# Altium PCB GEX_Zero.PcbDoc
Units mil, origin at the board's own origin, x right, y up, seen from the top; angles counter-clockwise.
Board outline 2559.06 x 1181.1 mil, 2 copper layers (Top Layer, Bottom Layer); 35 components, 63 nets, 209 pads, 187 vias.
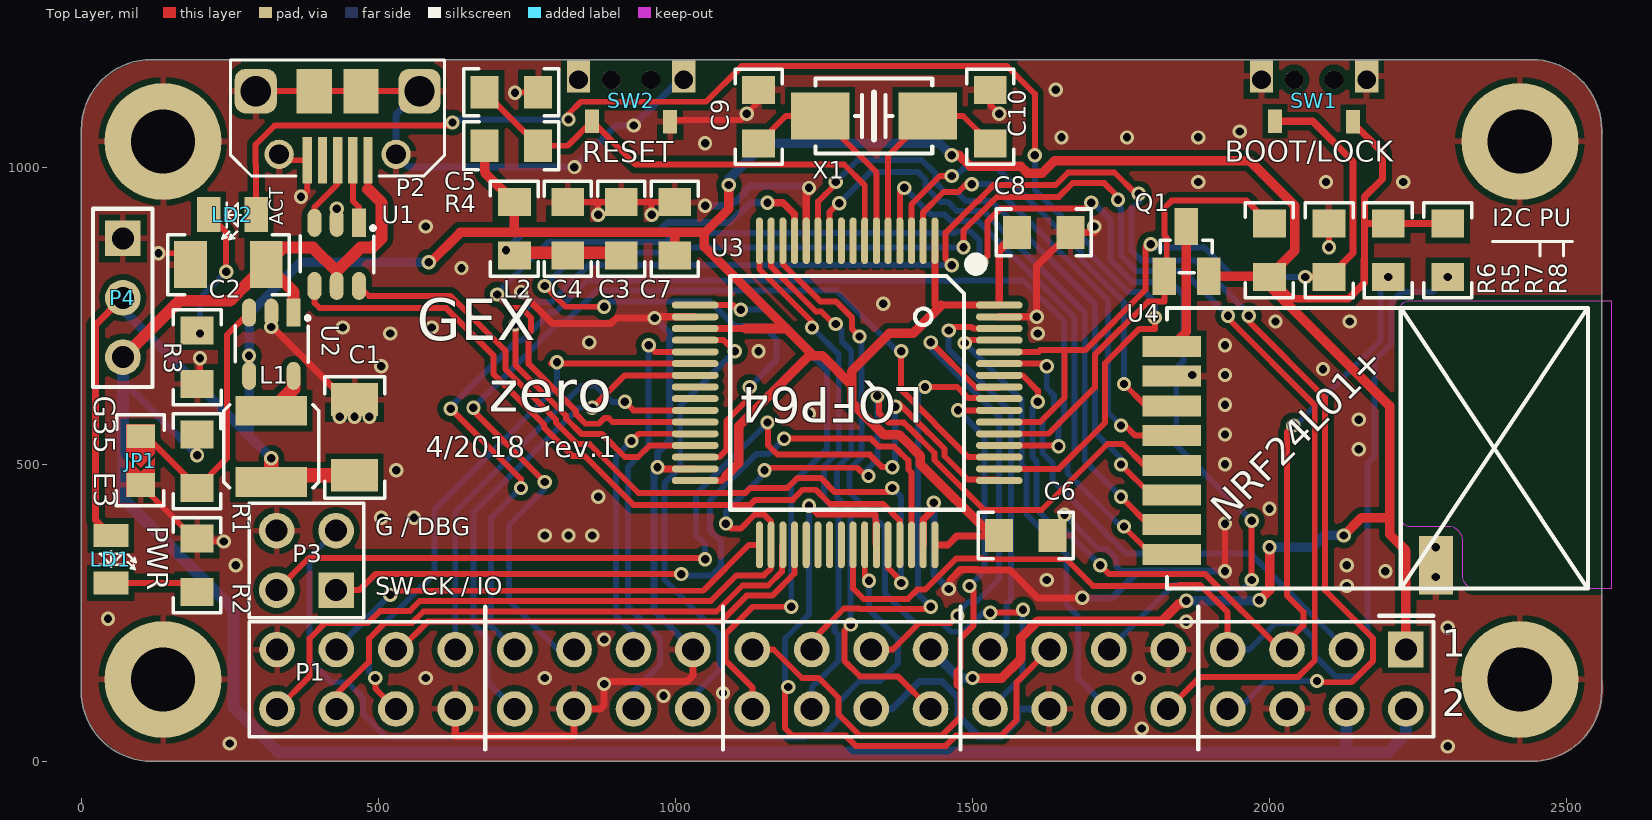
[diagram p0: Top Layer view]
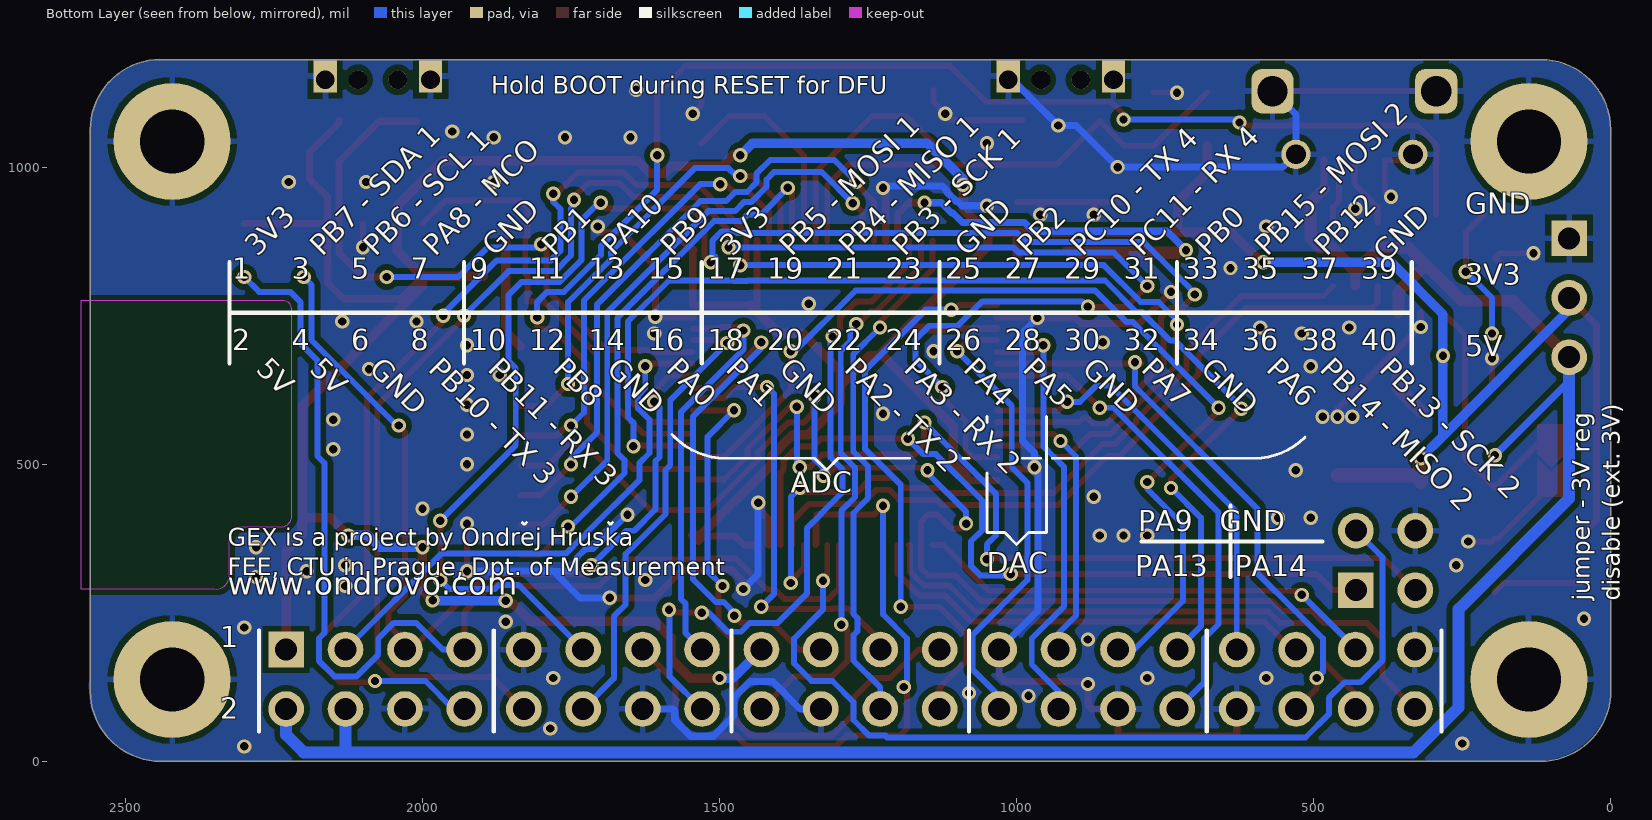
[diagram p1: Bottom Layer view, seen from below]

## Layer stack, top to bottom
Top Solder: solder mask 0.4, Solder Resist, Dk 3.5
Top Layer: signal copper 1.4
Dielectric 1: dielectric 12.6, FR-4, Dk 4.8
Bottom Layer: signal copper 1.4
Bottom Solder: solder mask 0.4, Solder Resist, Dk 3.5

## Board outline
118.11,0 cw(c118.11,118.11) 0,118.11 0,1062.99 cw(c118.11,1062.99) 118.11,1181.1 2440.95,1181.1 cw(c2440.95,1062.99) 2559.06,1062.99 2559.05,118.11 cw(c2440.95,118.11) 2440.94,0

## Design rules (kind name [scope] priority, off if disabled: settings)
Clearance Clearance_1 [OnLayer('Bottom Overlay') vs OnLayer('Bottom Overlay')] p1: gap=3
Clearance [All] p2: gap=10 except(7: Track-Track Track-SMDPad SMDPad-SMDPad)
DiffPairsRouting [All] p1: maxlimit=10 minlimit=10 mostfreqgap=10 toplayer_minwidth=7 toplayer_maxwidth=16 toplayer_prefwidth=10 bottomlayer_minwidth=7 bottomlayer_maxwidth=16 bottomlayer_prefwidth=10 maxuncoupledlength=500
MinimumSolderMaskSliver [All] p1 off: minsoldermaskwidth=10
PolygonConnect PolygonConnect_GND [All vs InNet('GND') And IsVia] p1: connectstyle=Direct reliefconductorwidth=10 reliefentries=4 polygonreliefangle="90 Angle" airgapwidth=10
PolygonConnect [All] p2: connectstyle=Relief reliefconductorwidth=10 reliefentries=4 polygonreliefangle="90 Angle" airgapwidth=10
RoutingVias [All] p1: holewidth=14 width=24 viastyle="Through Hole" minholewidth=14 minwidth=24 maxholewidth=100 maxwidth=100
SilkToSilkClearance [All] p1 off: silktosilkclearance=10
SilkToSolderMaskClearance [IsPad] p1 off: minsilkscreentomaskgap=10 clearancetoexposedcopper=TRUE
SolderMaskExpansion [All] p1: expansion=2
Width ThickSupply [(InNet('3V3') OR InNet('3V3A') OR InNet('5V'))] p1: maxlimit=40 minlimit=12 preferedwidth=40
Width [All] p2: maxlimit=100 minlimit=7 preferedwidth=10
26 further rules are at their usual default settings.

## Classes and differential pairs
component class GEX_Zero: C1 C2 C3 C4 C5 C6 C7 C8 C9 C10 JP1 L1 L2 LD1 LD2 P1 P2 P3 P4 Q1 R1 R2 R3 R4 R5 R6 SW1 SW2 U1 U3 U4 X1
differential pair USB: +USB_P -USB_N

## Components (designator, comment, footprint, x,y, rotation, side; value= is the part's Value field where it differs from the comment)
C1 "4u7" C1206 460,545 r270 top
C2 "4u7" C1206 247.75,836 r0 top
C3 "1u" C0805 909,896 r270 top
C4 "100n" C0805 819,896 r270 top
C5 "100n" C0805 724,1126 r180 top
C6 "100n" C0805 1590,380 r180 top
C7 "100n" C0805 999,896 r270 top
C8 "1u" C0805 1620,890 r180 top
C9 "12p" C0805 1140,1085 r270 top
C10 "12p" C0805 1530,1085 r270 top
JP1 "EXT_SUP" 0805_SolderShort_2 100,502.88 r270 top
L1 "4.7uH" L_3x3 320,530 r270 top
L2 "BEAD" R0805 729,896 r270 top
LD1 "PWR" LED_SMD 50,340 r270 top
LD2 "ACT" LED_SMD 254.32,920 r180 top
P1 "RPi 20x2 Header" PIN_2x20 2229.47,188 r180 top locked
P2 "USB_Micro_TypeB_Molex_105017" USB_Micro-B_AFCI_10118194 431.54,1184.94 r180 top locked
P3 "Rpi 2x2 Header" PIN_2x2 379,338 r180 top locked
P4 "EPW" PIN_1x3 70,780 r270 top
Q1 "BSS84" SOT23 1823,816 r0 top
R1 "100k" R0805 195,505 r270 top
R2 "470" R0805 195,330 r270 top
R3 "1k" R0805 195,680 r90 top
R4 "100k" R0805 724,1036 r0 top
R5 "100k" R0805 2100,860 r90 top
R6 "100k" R0805 2000,860 r270 top
R7 "1k8" R0805 2200,860 r270 top
R8 "1k8" R0805 2300,860 r270 top
SW1 "BOOT/LOCK" SIDE_BTN_2-4-3.5 2075,1147 r0 top
SW2 "RESET" SIDE_BTN_2-4-3.5 925.46,1147 r0 top
U1 "ESD" SOT23-6 467.4,898.43 r270 top
U2 "MCP1603" SOT23-5 357.4,747.13 r270 top
U3 "STM32F072RBT6" LQFP64 1436.8,846.47 r270 top locked
U4 "NRF_MINI" NRF_MINI 1827.24,763.07 r270 top locked
X1 "8MHz" XTAL-SMD-50-32 1334,1086 r0 top

## Footprints (in the part's own frame and the unit in brackets; to place one, negate y for a bottom-side part, rotate by r counter-clockwise, add the part's x,y. Pads: shape width x height; smd on the part's side, far side on the other; paste and mask are expansions set on the pad)
0805_SolderShort_2 [mil] "To make solder short, 0805 compatible."
  rect 40x48 smd: 1(-44,0) 2(37.88,0)
  Top Layer region: -8.12,24 40.88,24 57.88,24 57.88,-24 -8.12,-24 15.88,0
  Top Layer region: -64,24 -15,24 9,0 -15,-24 -64,-24
  silkscreen extent -80,-41 73,40, body extent -45,-7 39,8, height 5
C0805 [mm]
  rect 1.2x1.4 smd: 1(-1.143,0) 2(1.143,0)
  silkscreen extent -2.03,-1 2.03,1, body extent -1,-0.63 1,0.63, height 0.5
C1206 [mm]
  rect 1.4x2 smd: 1(-1.619,0) 2(1.619,0)
  silkscreen extent -2.6,-1.28 2.6,1.28, body extent -1.6,-0.8 1.6,0.8, height 1
L_3x3 [mil]
  rect 50x120 smd: 1(-60,0) 2(60,0)
  silkscreen extent -70,-80 70,80, body extent -60,-60 60,60, height 50
LED_SMD [mm]
  rect 1x1.5 smd: A(-1.016,0) C(1.016,0)
  silkscreen extent -0.36,-0.51 0.43,1.05, body extent -1.05,-0.45 1.02,0.45, height 0.85
LQFP64 [mm]
  oval 2x0.3 smd: 1(-0.75,0) 2(-0.75,-0.5) 3(-0.75,-1) 4(-0.75,-1.5) 5(-0.75,-2) 6(-0.75,-2.5) 7(-0.75,-3) 8(-0.75,-3.5) 9(-0.75,-4) 10(-0.75,-4.5) 11(-0.75,-5) 12(-0.75,-5.5) 13(-0.75,-6) 14(-0.75,-6.5) 15(-0.75,-7) 16(-0.75,-7.5) 33(12.25,-7.5) 34(12.25,-7) 35(12.25,-6.5) 36(12.25,-6) 37(12.25,-5.5) 38(12.25,-5) 39(12.25,-4.5) 40(12.25,-4) 41(12.25,-3.5) 42(12.25,-3) 43(12.25,-2.5) 44(12.25,-2) 45(12.25,-1.5) 46(12.25,-1) 47(12.25,-0.5) 48(12.25,0)
  oval 0.3x2 smd: 17(2,-10.25) 18(2.5,-10.25) 19(3,-10.25) 20(3.5,-10.25) 21(4,-10.25) 22(4.5,-10.25) 23(5,-10.25) 24(5.5,-10.25) 25(6,-10.25) 26(6.5,-10.25) 27(7,-10.25) 28(7.5,-10.25) 29(8,-10.25) 30(8.5,-10.25) 31(9,-10.25) 32(9.5,-10.25) 49(9.5,2.75) 50(9,2.75) 51(8.5,2.75) 52(8,2.75) 53(7.5,2.75) 54(7,2.75) 55(6.5,2.75) 56(6,2.75) 57(5.5,2.75) 58(5,2.75) 59(4.5,2.75) 60(4,2.75) 61(3.5,2.75) 62(3,2.75) 63(2.5,2.75) 64(2,2.75)
  silkscreen extent 0,-8.75 10.75,2, body extent 0.75,-8.75 10.75,1.25, height 1.6
NRF_MINI [mm]
  rect 0.9x2.5 smd: 1(1.65,0.2) 2(2.92,0.2) 3(4.19,0.2) 4(5.46,0.2) 5(6.73,0.2) 6(8,0.2) 7(9.27,0.2) 8(10.54,0.2)
  rect 2.5x1.45 smd: 9(11,11.5)
  silkscreen extent 0,0 12,18, body extent 0,0 12,18, height 1.5
PIN_1x3 [mil] "Header 1Row 3Way 2.54mm"
  rect 60x60 hole 37: 1(-100,0)
  round 60 hole 37: 2(0,0) 3(100,0)
  silkscreen extent -150,-50 150,50, body extent -150,-50 150,50, height 400
PIN_2x2 [mil] "Header 2Row 2Way 2.54mm"
  rect 60x60 hole 37: 1(-50,50)
  round 60 hole 37: 2(50,50) 3(-50,-50) 4(50,-50)
  silkscreen extent -97,-97 97,97, body extent -100,-100 100,100, height 400
PIN_2x20 [mil] "Header 2Row 16Way 2.54mm"
  rect 60x60 hole 37: 1(0,0)
  round 60 hole 37: 2(0,100) 3(100,0) 4(100,100) 5(200,0) 6(200,100) 7(300,0) 8(300,100) 9(400,0) 10(400,100) 11(500,0) 12(500,100) 13(600,0) 14(600,100) 15(700,0) 16(700,100) 17(800,0) 18(800,100) 19(900,0) 20(900,100) 21(1000,0) 22(1000,100) 23(1100,0) 24(1100,100) 25(1200,0) 26(1200,100) 27(1300,0) 28(1300,100) 29(1400,0) 30(1400,100) 31(1500,0) 32(1500,100) 33(1600,0) 34(1600,100) 35(1700,0) 36(1700,100) 37(1800,0) 38(1800,100) 39(1900,0) 40(1900,100)
  silkscreen extent -47,-57 1947,147, body extent -50,-50 1950,150, height 400
R0805 [mm]
  rect 1.2x1.4 smd: 1(-1.143,0) 2(1.143,0)
  silkscreen extent -2.03,-1.03 2.03,1.02, body extent -1,-0.63 1,0.63, height 0.5
SIDE_BTN_2-4-3.5 [mm] "Miniature side push 2-pad button with optional mechanical pins and through-hole bracket"
  rect 0.6x1 smd: 1(-1.67,-1.775) 2(1.67,-1.8)
  rect 1x1.4 hole 0.8 copper offset 0,0.15: 3(-2.25,0) 3(2.25,0)
  round 0.79 hole 0.8 unplated: 5(-0.85,0) 5(0.85,0)
  body extent -2.25,-1.5 2.25,2, height 1.8
SOT23 [mm]
  rect 1x1.6 smd: 1(0,0) 2(1.905,0) 3(0.94,2.134)
  silkscreen extent -0.18,0.15 2.06,1.55, body extent -0.48,-0.31 2.44,2.24, height 0.94
SOT23-5 [mm]
  rect 1.2x0.6 smd: 1(-0.2,0)
  oval 1.2x0.6 smd: 2(-0.2,-0.95) 3(-0.2,-1.9) 4(2.5,-1.9) 5(2.5,0)
  silkscreen extent -0.05,-2.5 1.93,0.67, body extent -0.24,-2.35 2.55,0.45, height 0.8
SOT23-6 [mm]
  rect 1.2x0.6 smd: 1(-0.2,0)
  oval 1.2x0.6 smd: 2(-0.2,-0.95) 3(-0.2,-1.9) 4(2.5,-1.9) 5(2.5,-0.95) 6(2.5,0)
  silkscreen extent -0.05,-2.5 1.93,0.68, body extent -0.24,-2.35 2.55,0.45, height 0.8
USB_Micro-B_AFCI_10118194 [mm]
  rect 0.4x2 smd: 1(-1.3,4.404) 2(-0.65,4.404) 3(0,4.404) 4(0.65,4.404) 5(1.3,4.404)
  rrect50% 1.8x1.9 hole 1.3: SH(-3.5,1.45) SH(3.5,1.45)
  round 1.25 hole 0.85: SH(-2.5,4.15) SH(2.5,4.15)
  rect 1.5x1.9 smd: SH(-1,1.45) SH(1,1.45)
  silkscreen extent -4.57,0.13 4.57,5.08, body extent -4.09,-1.17 4.11,4.26, height 2.73
XTAL-SMD-50-32 [mm]
  rect 2.5x2 smd: 1(-2.3,0) 2(2.3,0)
  silkscreen extent -2.5,-1.6 2.5,1.6, body extent -2.51,-1.6 2.51,1.6, height 1.2

## Part data
C1 C2 C3 C4 C5 C6 C7 C8 C9 C10: library part C
JP1: library part JUMP
L1 L2: library part L, "Inductor"
LD1 LD2: library part LED
P1: library part "Header 20X2", "Header, 20-Pin, Dual row"
P2: "Connector SMD USB Micro Type B bottom mount, (recommended if hand soldering)"
P3: library part "Header 2X2", "Header, 2-Pin, Dual row"
P4: library part Header_3, "Header, 3-Pin"
Q1: "P-Channel Enhancement Mode Vertical DMOS FET"
R1 R2 R3 R4 R5 R6 R7 R8: library part R
SW1 SW2: library part SW_SPST_4PAD_GND
U1: library part USBLC6_ESD
X1: library part XTALL

## Free pads (board coordinates)
  round 196.85 hole 108.27 paste+0: H1(2421.2,137.69) H2(137.74,137.69) H3(137.74,1043.2) H4(2421.2,1043.2)

## Via types
v1: diameter 24, hole 14, Top Layer to Bottom Layer, tented both sides, 187 vias

## Nets (pads, with @x,y where several pads share a name; then routed paths per layer and width w, separated by ;. In a path a pad name is that pad's centre, name@x,y a point inside that pad or via, vN(x,y) a via of type N, cw(c..) or ccw(c..) an arc to the next point about the centre after c; other vN are vias at no path point)
3V3: C1.2 C6.2 C7.2 C8.2 L1.2 L2.1 LD1.A P1.1 P1.17 P4.2 Q1.2 R4.1 R6.2 R7.1 R8.1 SW1.2 U2.4 U3.1 U3.19 U3.32 U3.48 U3.64 | length 7837
  Top Layer w12: LD1.A 24,406 24,734 P4.2 ; U3.32 1077.46,472.46 1085,480 ; U3.19 1118.36,728.36 ; U3.48 1458.68,364.19 1473.49,379 1526.51,379 1535.25,370.25 C6.2 ; 1436.8,767.73 U3.1 ; 1447.73,767.73 U3.64 1545.06,859.94 1545,860 ; R6.2 2036.62,778.38 2132.94,778.38 2159.44,804.88 2159.44,844.01 2159.56,844.12 2159.56,905 ; SW1.2@2140.75,1079.13 SW1.2 2140.75,1074.29 2190,1025.04 2190,980 2159.56,949.56 2159.56,905 ; R8.1 R7.1 2159.56,905
  Top Layer w16: v1(585,840) 588.28,840 638.28,890 729.62,890 ; R4.1 679,991 L2.1 729,890.62 729.62,890 ; C7.2 999,890 ; 1085,480 1106.62,501.62 1106.62,564.05 1225.07,682.5 1232.5,682.5 ; v1(1090,970) 1090,930 1048.62,888.62 ; 1118.36,728.36 1186.64,728.36 ; 1447.73,767.73 1400,720 1360,720 1296.47,656.47 1296.47,633.53 ; v1(1465,1020) 1477.61,1020 1496.23,1001.38 1581.2,1001.38 1592.57,990 1617.43,990 1638.43,1011 1966.39,1011 2042.56,934.84 2042.56,859.56 R6.2@1999,816 ; v1(1500,140) 1549.35,140 1581.47,172.12 1581.47,207.88 1609.59,236 1818.57,236 1847.57,265 1855,265 v1(1860,270) ; C6.2 1532.57,380 1412,500.57 1412,514.47 1384.47,542 1384.09,542 1376.23,549.87 1350.48,549.87 1296.47,603.88 1296.47,633.53 ; 1545,860 C8.2 ; Q1.2 R6.2@1999,816 ; v1(1982.92,271) 2000,288.08 v1(2000,360) ; v1(2125,380) 2155,410 2202,410 ; P1.1 2229.47,354.53 2202,382 2202,410 ; 729.62,890 730,889.62 730.38,890 999,890 ; 999,890 1048.62,890 1048.62,888.62 ; 1048.62,888.62 1048.62,866.38 1186.64,728.36 ; 1186.64,728.36 1232.5,682.5 ; 1232.5,682.5 1247.5,682.5 1296.47,633.53 ; R6.2@1999,816 R6.2 2000,800 2202,598 2202,410
  Top Layer w24: v1(320,510) L1.2 331.25,481.25 C1.2
  Bottom Layer w16: P4.2 70,760 282.4,547.6 ; v1(320,510) 282.4,547.6 ; v1(585,840) 370,840 282.4,752.4 v1(282.4,682.4) 282.4,547.6 ; v1(1090,970) 1090,980 1150,1040 1445,1040 v1(1465,1020) ; P1.17 1477.47,140 v1(1500,140) ; v1(1860,270) 1981.92,270 v1(1982.92,271) ; v1(2000,360) 2071.92,360 2091.92,380 v1(2125,380)
3V3A: C3.2 C4.2 L2.2 U3.13 | length 967.1
  Top Layer w12: v1(715,860) 918,860 C3.2 C4.2 L2.2 ; v1(1155,940) 1181.15,940 1200.57,920.58 U3.13
  Bottom Layer w12: v1(715,860) 747,892 971.6,892 986.6,907 1090.87,907 1106.87,923 1109.47,923 1126.47,940 v1(1155,940)
5V: C2.2 P1.2 P1.4 P2.1 P4.3 R1.1 U1.5 U2.1 | length 3794.1
  Top Layer w12: 482.72,962.72 P2.1
  Top Layer w16: U1.5 430,824.56
  Top Layer w20: P4.3 70.37,680 165.37,775 250.5,775 253.79,778.29 253.79,778.74 275,799.96 275.46,799.96 C2.2 ; U2.1 357.4,790.1 C2.2 ; 482.72,962.72 505.44,940 505.44,880 490,864.56 470,864.56 430,824.56 390,864.56 340.06,864.56 C2.2
  Bottom Layer w12: 70,640 v1(195,515)
  Bottom Layer w20: P4.3 70,640 70,442.28 256.17,256.12 256.17,90.6 331.76,15 2130,15 ; P1.4 2129.47,15.53 2130,15 ; P1.2 2229.47,44.47 2200,15 2130,15
BOOT0: R5.1 SW1.1 U3.54 U3.60 | length 1274.2
  Top Layer w10: U3.54 1614.07,570.88 1655,611.82 1655,688.99 1651.99,692 ; U3.60 1610.81,688.99 1613.82,692 1651.99,692 ; v1(1800,870) 1795,870 1791.31,866.31 1791.31,793.54 1689.77,692 1651.99,692
  Top Layer w12: SW1.1 2072.87,1077.13 2140.56,1009.44 2140.56,855.56 R5.1 v1(2060,815)
  Bottom Layer w10: v1(1800,870) 1805,865 1890,865 1940,815 v1(2060,815)
DEBUG_TX: P3.3 U3.42 | length 1583.3
  Top Layer w10: v1@1318.68,306.32 U3.42
  Bottom Layer w10: P3.3 384,343 384,169.83 420.83,133 448.11,133 474.47,106.64 474.47,79.36 513.83,40 1217.83,40 1220.83,43 1248.11,43 1274.47,69.36 1274.47,99.47 1310,135 1345,135 1374.47,164.47 1374.47,206.64 1326,255.11 v1(1326,303.63)
GND: C1.1 C2.1 C3.1 C4.1 C5.1 C6.1 C7.1 C8.1 C9.1 C10.1 JP1.2 P1.6 P1.9 P1.14 P1.20 P1.25 P1.30 P1.34 P1.39 P2.5 P2.SH P3.4 P4.1 pad.H1 pad.H2 pad.H3 pad.H4 R2.1 R3.1 R5.2 SW1.3 SW2.2 SW2.3 U1.2 U2.2 U3.12 U3.18 U3.31 U3.47 U3.63 U4.2 U4.9 | length 5700.8
  Top Layer w10: JP1.2 190,375 R2.1 200,370 v1(240,370) ; v1(130,855) 187,855 195,847 C2.1 ; R3.1 200,640 v1(200,678.15) ; P2.SH@293.74,1127.85 392.17,1127.85 470.91,1127.85 P2.SH@569.33,1127.85 ; P2.SH@333.11,1021.55 343.11,1011.55 P2.5 380.36,960.36 v1(370,950) ; v1(730,1125) 731,1126 C5.1 ; C4.1 865,941 ; v1(870,920) 870,936 865,941 ; v1(960,920) 960,936 955,941 ; SW2.2@990.75,1079.13 1109.13,1079.13 v1(1120,1090) 1140,1110 C9.1 ; C7.1 955,941 ; C10.1 1530,1105 v1(1545,1090) ; v1(1925,320) v1(1925,400) ; v1(2100,865) R5.2 ; 865,941 C3.1 955,941
  Top Layer w12: U2.2 v1(320,730.97) 322.03,730.97 460,593 v1(460,580) ; P1.34 629.47,42 827,42 829.47,44.47 P1.30 874.16,88 880,93.84 v1(880,130) 884,134 1019,134 1029.47,144.47 P1.25 ; v1(740,790) 793,737 891.6,737 900.69,746.09 v1(965,746.09) 966.95,748.05 U3.18 ; v1(970,495) 972.86,492.14 U3.31 ; U3.12 1220.26,960.26 v1(1225,965) ; U3.47 1417.11,407.11 1435,425 v1(1435,435) ; v1(1460,290) 1462,292 1462,305.15 1479.85,323 1508.39,323 1509.39,322 1563,322 1610,275 v1(1685,275) ; U3.63 v1(1608.05,748.05) 1608.05,833.05 C8.1 1705,890 v1(1705,900)
  Bottom Layer w10: v1(1655,415) 1713,357 1726.18,357 1742,341.18 1742,328 1750,320 1780,320
  Bottom Layer w12: P2.SH@569.33,1127.85 529.96,1088.48 529.96,1021.55 551.52,1000 v1(830,1000) 900,1070 v1(930,1070) SW2.3@1005.57,1145.57 ; v1(965,746.09) 990.14,720.95 990.14,539.5 970,519.36 v1(970,495) 963.82,488.82 963.82,253.66 P1.25 ; SW2.3@1013.58,1150 1010,1150 SW2.3@1005.57,1145.57 ; SW2.3@1015.69,1145.57 SW2.3@1005.57,1145.57 ; v1(1050,935) 1092,935 1099,942 1101.6,942 1118,958.4 1118,961 1125,968 1222,968 v1(1225,965) ; P1.20 1364.42,88 1410.42,134 1448.53,134 1475.47,107.05 1475.47,76.95 1510.42,42 1548.53,42 1575.47,68.95 1575.47,84.91 1578.56,88 P1.14 ; v1(1435,435) 1435,315 v1(1460,290) ; v1(1685,275) 1735,275 1780,320 v1(1925,320)
  other v1: 2300,25 250,30 1785,55 980,110 1080,115 580,140 780,140 1780,140 880,205 2300,225 1860,235 45,240 2130,295 1625,305 2280,310 2195,320 260,330 2130,330 2280,360 780,380 820,380 860,380 505,410 560,410 2000,425 870,445 530,490 1925,500 2150,525 1925,550 2150,575 435,580 485,580 1225,585 1925,600 1870,650 1925,650 2090,660 505,665 1140,690 1925,700 855,705 520,720 1610,720 440,730 590,730 2010,740 2135,740 1350,770 640,830 580,900 430,930 1880,975 2095,975 2225,975 1050,1040 1650,1050 1760,1050 1880,1050 1950,1060 1640,1130
LED: LD2.A U3.50 | length 2422.8
  Top Layer w10: LD2.A 294.32,1004.34 293.51,1005.15 293.51,1037.96 325.55,1070 620,1070 v1(625,1075) ; v1(820,1080) 820,1089.35 840.65,1110 1051.46,1110 1111.46,1170 1558.15,1170 1605,1123.15 v1(1605,1020) ; U3.50 1645.33,492.14 1723,569.82 1723,669.89 1780.93,727.83 1806.87,727.83 v1(1806.87,746.87)
  Bottom Layer w10: v1(625,1075) 630,1080 v1(820,1080) ; v1(1605,1020) 1605,961.82 1699.77,867.04 1699.77,852.09 1761.86,790 1790,790 1806.87,773.13 v1(1806.87,746.87)
N_3V3: Q1.3 U4.1 | length 212.2
  Top Layer w16: U4.1 1860,722.99 Q1.3
N_CE: U3.3 U4.3 | length 777.9
  Top Layer w10: U3.3 1397.43,937.42 1445,985 v1(1465,985) ; v1(1755,635) 1791.89,598.11 U4.3
  Bottom Layer w10: v1(1465,985) 1467,987 1473.82,987 1485.06,998.25 1541.75,998.25 1682.77,857.23 1682.77,845.05 1755,772.82 v1(1755,635)
N_IRQ: U3.4 U4.8 | length 969
  Top Layer w10: U3.4 1377.74,957.74 v1(1385,965) ; v1(1755,395) 1754.33,395 1801.22,348.11 U4.8
  Bottom Layer w10: v1(1385,965) 1430,920 1453.18,920 1464.18,909 1509.32,909 1672,746.32 1672,518.82 1660,506.82 1660,485 1750,395 v1(1755,395)
N_MISO: U3.10 U4.7 | length 1051.6
  Top Layer w10: U3.10 1259.63,924.63 1274.32,939.32 v1(1275.68,939.32) ; v1(1750,445) 1796.89,398.11 U4.7
  Bottom Layer w10: v1(1275.68,939.32) 1326.37,990 1328.37,992 1408,992 1421,979 1421,966.77 1446.77,941 1459,941 1474,926 1519,926 1689,756 1689,506 v1(1750,445)
N_MOSI: U3.11 U4.6 | length 1066.5
  Top Layer w10: U3.11 1239.95,941.76 1252,953.82 1265.18,967 1270,971.82 v1(1270,975) ; v1(1750,499.33) 1801.22,448.11 U4.6
  Bottom Layer w10: v1(1270,975) 1307.07,1012.07 1414.67,1012.07 1438,988.74 1438,973.82 1453.82,958 1473.82,958 1488.82,943 1532,943 1706,769 1706,554 1750,510 v1(1750,499.33)
N_NSS: U3.2 U4.4 | length 771.4
  Top Layer w10: U3.2 1417.11,923.93 1451.18,958 1476.18,958 1489.43,971.25 v1(1499,971.25) ; v1(1750,565) 1757.23,565 1774.12,548.11 U4.4
  Bottom Layer w10: v1(1499,971.25) 1532.53,971.25 1549.39,954.39 1681,822.78 1728,775.78 1728,587 v1(1750,565)
N_RESET: Q1.1 R6.1 U3.53 | length 761
  Top Layer w10: U3.53 1628.01,551.2 1706,629.18 1706,684.18 1795.68,773.87 1823,773.87 Q1.1 1827,820 1827,881.18 1823,885.18 1823,931.15 1835.34,943.5 1961.5,943.5 R6.1
N_SCK: P1.40 U3.34 U4.5 | length 2243
  Top Layer w10: P1.40 384.47,143 384.47,206.64 410.83,233 483,233 503,253 553.04,253 570.04,270 1060,270 1102.82,312.82 1148.94,312.82 1161.2,325.09 U3.34 1161.2,403.29 1148.94,415.56 1134.1,415.56 1110,391.46 1093.54,391.46 v1(1085,400) ; v1(1150,490) 1154,494 1306,494 1320,480 v1(1325,480) ; v1(1340,615) 1340,609.75 1342.95,606.8 1342.95,585.68 1358.77,569.87 1384.51,569.87 1392.38,562 1392.75,562 1436,518.75 1436,506.77 1519.77,423 1616.18,423 1727.28,534.09 1753.42,534.09 1789.4,498.11 U4.5
  Bottom Layer w10: v1(1085,400) 1085,420 1150,485 v1(1150,490) ; v1(1325,480) 1325,483.18 1320,488.18 1340,508.18 v1(1340,615)
NetJP1_1: JP1.1 R1.2 U2.3 | length 463
  Top Layer w10: JP1.1 109.33,546.88 195,461.21 R1.2 245,510 245,717.4 U2.3
NetL1_1: L1.1 U2.5 | length 74.2
  Top Layer w24: L1.1 357.4,627.4 U2.5
NetLD1_C: LD1.C R2.2 | length 151.2
  Top Layer w10: LD1.C 180,300 R2.2
NetLD2_C: LD2.C R3.2 | length 230.5
  Top Layer w10: LD2.C 244,890.32 v1(244,824)
  Bottom Layer w10: v1(200,720) 200,780 v1(244,824)
NetP2_2: P2.2 U1.1 | length 109.5
  Top Layer w10: P2.2 457.13,942.87 467.4,932.6 U1.1
NetP2_3: P2.3 U1.3 | length 121.4
  Top Layer w10: U1.3 392.6,932.6 431.54,971.54 P2.3
NRST: C5.2 R4.2 SW2.1 U3.7 | length 834
  Top Layer w10: C5.2 R4.2 818.58,1036 SW2.1@859.25,1076.67 ; SW2.1@859.82,1077.24 859.25,1077.81 SW2.1@859.25,1076.67 ; U3.7 1318.68,969.5 1283.81,1004.38 932.68,1004.38 859.93,1077.13 SW2.1 SW2.1@859.25,1076.67
OSC_IN: C10.2 U3.5 X1.2 | length 362.1
  Top Layer w10: U3.5 1358,876.06 1358,1019.45 X1.2 1484,1086 C10.2
OSC_OUT: C9.2 U3.6 X1.1 | length 371.8
  Top Layer w10: C9.2 1186,1086 X1.1 1338.37,991.08 U3.6
PA0: P1.16 U3.14 | length 1179.9
  Top Layer w10: U3.14 1180.89,836.9 1243.79,774 1270.18,774 1297,747.18 1297,728 v1(1310,715) ; v1(1530,250) 1580,250 v1(1585,255)
  Bottom Layer w10: v1(1310,715) 1308.47,713.47 1313,708.94 1313,511.18 1293,491.18 1293,452.96 1329.24,416.72 1329.24,415.72 1353,391.96 1353,282 1402,233 1448.82,233 1463.82,218 1486.18,218 1518.18,250 v1(1530,250) ; P1.16@1529.47,105.53 P1.16 1584.47,143 1584.47,254.47 v1(1585,255)
PA1: P1.18 U3.15 | length 972.2
  Top Layer w10: U3.15 1161.2,832.54 1236.75,757 1245.46,757 1266.46,736 v1(1270,736) ; v1(1295,230) 1284.47,219.47 1284.47,169.36 1310.83,143 1374.47,143 P1.18
  Bottom Layer w10: v1(1270,736) 1280,726 1280,706.82 1296,690.82 1296,518.23 1272,494.23 1272,444.47 1295,421.47 v1(1295,230)
PA2: P1.22 U3.16 | length 887.8
  Top Layer w10: U3.16 1141.52,828.18 1230,739.7 v1(1230,730)
  Bottom Layer w10: P1.22 1229.47,124.36 1274.47,169.36 1274.47,212.34 1268,218.82 1268,241.18 1274.47,247.66 1274.47,417.96 1252,440.43 1252,441.18 1250,443.18 1250,496.27 1275,521.27 1275,685 v1(1230,730)
PA3: P1.24 U3.17 | length 964.7
  Top Layer w10: U3.17 1097.27,767.73 1105,760 v1(1110,760) ; P1.24 1129.47,124.36 1084.47,169.36 1084.47,214.47 1130,260 v1(1195,260)
  Bottom Layer w10: v1(1110,760) 1153.18,760 1255,658.18 1255,525.31 1195,465.31 v1(1195,260)
PA4: P1.26 U3.20 | length 782.5
  Top Layer w10: U3.20 1081.32,708.68 v1(1100,690)
  Bottom Layer w10: P1.26 1029.47,109.63 1074.47,154.63 1074.47,212.34 981.82,305 981.82,468.63 1008.14,494.96 1008.14,598.14 v1(1100,690)
PA5: P1.28 U3.21 | length 750.6
  Top Layer w10: v1(955,700) 966.01,688.99 U3.21
  Bottom Layer w10: P1.28 929.47,117.95 974.47,162.95 974.47,206.64 920,261.11 920,495 937,512 937.18,512 954.49,529.3 954.49,579.01 955,579.52 v1(955,700)
PA6: P1.36 U3.22 | length 986.7
  Top Layer w10: v1(495,140) 495,122.47 P1.36 ; v1(800.72,671.42) 792.8,671.42 790.69,669.31 U3.22
  Bottom Layer w10: v1(495,140) 484.47,150.53 484.47,206.64 530.83,253 531.18,253 594.71,316.52 594.71,424.71 800.72,630.72 v1(800.72,671.42)
PA7: P1.32 U3.23 | length 828.1
  Top Layer w10: v1(860,595) 914.62,649.62 U3.23
  Bottom Layer w10: P1.32 684.47,133 684.47,206.64 660,231.11 660,418.18 836.82,595 v1(860,595)
PA8: P1.7 R8.2 U3.41 | length 1905
  Top Layer w10: U3.41 1299,291 1317,273 1391.18,273 1407,288.82 1420.21,288.82 1472.39,341 1515.85,341 1516.85,340 1658.18,340 1703.18,295 1846.82,295 1848.82,297 1883,297 1929.47,250.53 P1.7
  Bottom Layer w10: P1.7 1965.83,188 2010.83,233 2048.11,233 2074.47,206.64 2074.47,179.36 2110.83,143 2148.11,143 2174.47,169.36 2174.47,206.64 2165,216.11 2165,501.82 2177,513.82 2177,674.77 2205,702.77 2205,772.43 2222.57,790 2275,790 v1(2300,815)
PA10: P1.13 U3.43 | length 1165.8
  Top Layer w10: v1(1190,125) 1184.47,119.47 1184.47,55.53 1197,43 1286.79,43 1303.79,26 1455.15,26 1472.15,43 1548.11,43 1574.47,69.36 1574.47,133 P1.13 ; v1(1225,430) 1239.44,415.56 1335.89,415.56 1336.59,414.86 1336.59,365.97 U3.43 U3.43@1338.37,403.29
  Bottom Layer w10: v1(1190,125) 1184.47,130.53 1184.47,206.64 1225,247.17 v1(1225,430)
PA13: P3.1 U3.46 | length 1321.2
  Top Layer w10: P3.1 468,288 495,315 v1(1010,315) ; v1(1183,543) 1329.06,543 1342.2,529.87 1367.94,529.87 1375.81,522 1376.18,522 1392,506.18 1392,491.18 1397.43,485.76 U3.46
  Bottom Layer w10: v1(1010,315) 1012,313 1061.18,313 1077,328.82 1077,369.82 1058,388.82 1058,438.96 1136.04,517 1157,517 v1(1183,543)
PA14: P3.2 U3.49 | length 1636.8
  Top Layer w10: P3.2 383,342 1048,342 v1(1050,340) ; v1(1155,570) 1156,569 1156,531.82 1171.82,516 1327.18,516 1348.18,495 v1(1365,495) ; v1(1369.95,596.87) 1369.95,598.37 1375,603.42 1399.42,579 1399.79,579 1453,525.79 1453,513.82 1492.58,474.24 1543.28,474.24 U3.49
  Bottom Layer w10: v1(1050,340) 1050,365 1035,380 1035,450 v1(1155,570) ; v1(1365,495) 1369.95,499.95 v1(1369.95,596.87)
PB0: P1.33 U3.26 | length 740.4
  Top Layer w10: v1(915,605) 929.43,590.57 U3.26
  Bottom Layer w10: P1.33 629.47,419.47 842,632 866.18,632 893.18,605 v1(915,605)
PB1: P1.11 U3.27 | length 2742.8
  Top Layer w10: v1(700,785.56) 700,784.09 721.09,763 740.18,763 757,746.18 757,723.82 753,719.82 753,668.82 833,588.82 833,583.82 848.82,568 871.18,568 881.18,578 887,578 894.12,570.88 U3.27 ; v1(1515,840) 1525,850 1525,908.15 1546.85,930 1690,930 v1(1700,940) ; v1(1970,305) v1(1970,405)
  Bottom Layer w10: v1(700,785.56) 700,788.18 785.82,874 984,874 999,889 1470.82,889 1473.82,892 1496.18,892 1512,876.18 1512,853.82 1506.59,848.41 v1(1515,840) ; v1(1700,940) 1703.18,940 1732,911.18 1732,843.9 1768.9,807 1833,807 1855,785 1855,673.18 1843,661.18 1843,532 v1(1970,405) ; P1.11 1838.47,297 1871.18,297 1878.18,290 1955,290 v1(1970,305)
PB2: P1.27 U3.28 | length 495
  Top Layer w10: v1(926,539) 938.2,551.2 U3.28
  Bottom Layer w10: v1(926,539) 900,513 900,245 940,205 940,198.53 P1.27
PB3: P1.23 U3.55 | length 1071.5
  Top Layer w10: P1.23 1165.18,188 1213.18,140 1241.11,140 1274.47,106.64 1274.47,79.36 1310.83,43 1448.11,43 1480,74.89 1480,121.82 1473,128.82 1473,151.18 1480,158.18 1480,206.82 1502,228.82 1502,288 v1(1495,295) ; v1(1475.57,590.57) U3.55
  Bottom Layer w10: v1(1475.57,590.57) 1520,546.13 1520,320 v1(1495,295)
PB4: P1.21 U3.56 | length 757.1
  Top Layer w10: P1.21 1229.47,202.66 1283.82,257 1308.96,257 1309.96,256 1426,256 v1(1430,260) ; v1(1420,630) 1474.32,630 1493.16,611.16 1544.16,611.16 U3.56
  Bottom Layer w10: v1(1420,630) 1408,618 1408,282 v1(1430,260)
PB5: P1.19 U3.57 | length 858.6
  Top Layer w10: P1.19 1365.83,188 1410.83,233 1463,233 v1(1475,245) ; v1(1430,705) 1506.84,628.16 U3.57@1543.28,628.16
  Bottom Layer w10: v1(1430,705) 1430,695 1545,580 1545,306.82 1506.18,268 1493,268 1475,250 v1(1475,245)
PB6: P1.5 R7.2 U3.58 | length 1530.6
  Top Layer w10: U3.58 1584.16,649.62 1610,623.79 v1(1610,605) ; v1(1715,330) 1730,315 1891.82,315 2018.82,188 P1.5 2029.47,213 2041.18,213 2057,228.82 2057,251.18 2029.47,278.71 2029.47,554.47 v1(2040,565)
  Bottom Layer w10: v1(1610,605) 1601,596 1601,511.77 1608,504.77 1608,423.82 1643.82,388 1657,388 v1(1715,330) ; v1(2040,565) 2043.18,565 2186.82,708.63 2186.82,801.82 v1(2200,815)
PB7: P1.3 U3.59 | length 906.8
  Top Layer w10: U3.59 1620.69,669.31 v1(1625,665)
  Bottom Layer w10: v1(1625,665) 1625,628.18 1637,616.18 1637,593.82 1618,574.82 1618,518.82 1635,501.82 1635,473.18 1723.86,384.32 1723.86,382.96 1732.82,374 1734.18,374 1758.18,350 1967.47,350 P1.3
PB8: P1.12 U3.61 | length 776.4
  Top Layer w10: v1(1487,703.86) 1491.82,708.68 U3.61
  Bottom Layer w10: v1(1487,703.86) 1583,607.86 1583,498.27 1591,490.27 1591,415.82 1658,348.82 1658,263.82 1678,243.82 1678,139.47 P1.12
PB9: P1.15 U3.62 | length 683.7
  Top Layer w10: v1(1460,725) 1465.86,730.86 1498.18,730.86 1500.68,728.36 U3.62
  Bottom Layer w10: v1(1460,725) 1460,692.67 1565,587.67 1565,273.18 1557,265.18 1557,215.53 P1.15
PB10: P1.8 U3.29 | length 2960.9
  Top Layer w10: v1(730,735) 731,734 731,666.77 816,581.77 816,576.77 841.77,551 875.82,551 914.82,512 937.18,512 956.7,531.51 U3.29 ; v1(1465,835) 1454.8,845.2 1454.8,889.8 1506,941 1506.94,941 1532,966.06 1532,967 1535,970 1639.95,970 1660.95,991 1739,991 1775,955 v1(1780,955) ; v1(1965,750) 1965,740.46 2093.47,611.98 2093.47,287.64 2174.47,206.64 2174.47,169.36 2138.11,133 2082,133 v1(2080,135)
  Bottom Layer w10: v1(730,735) 730,741.82 761.18,773 791.18,773 853.18,835 v1(1465,835) ; v1(1780,955) 1780,941.82 1771.11,932.93 1768,929.82 1768,858.82 1783.82,843 1875.18,843 1965,753.18 v1(1965,750) ; P1.8 1948,88 1995,135 v1(2080,135)
PB11: P1.10 U3.30 | length 3020.4
  Top Layer w10: v1(780,800) 810,770 815,765 v1(880,765) ; U3.30 1073.77,511.83 1085.62,523.68 1085.62,572.75 1125,612.12 v1(1125,630) ; v1(1485,865) 1485,893.61 1541.39,950 1645.4,950 1668.4,973 1722,973 1745,950 v1(1745,945) ; P1.10 1883.47,142 2048.53,142 2076.09,169.57 2076.09,599.31 1930,745.4 v1(1930,750)
  Bottom Layer w10: v1(780,800) 836,856 996.51,856 1005.51,865 v1(1485,865) ; v1(880,765) 889.09,774.09 1057.72,774.09 1098.82,733 1147,733 1170,710 1170,675 v1(1125,630) ; v1(1745,945) 1745,935 1750,930 1750,851.36 1776.36,825 1855,825 v1(1930,750)
PB12: P1.37 U3.33 | length 785.9
  Top Layer w10: v1(520,280) 527,287 1046.69,287 1123.88,364.19 U3.33
  Bottom Layer w10: P1.37 429.47,189.47 v1(520,280)
PB14: P1.38 U3.35 | length 928.9
  Top Layer w10: P1.38 429.47,112.66 483.82,167 484.43,167 484.47,167.04 484.47,206.64 510.83,233 557.08,233 576.08,252 1069.16,252 1112.98,295.82 1155.98,295.82 1179.11,318.95 1179.11,362.41 U3.35
PB15: P1.35 U3.36 | length 772.1
  Top Layer w10: P1.35 536.12,188 583.12,235 1076.2,235 1120.02,278.82 1163.02,278.82 1200.58,316.37 U3.36
PC0: U3.8
PC1: U3.9
PC4: U3.24
PC5: U3.25
PC6: U3.37
PC7: U3.38
PC8: U3.39
PC9: U3.40
PC10: P1.29 U3.51 | length 1680.6
  Top Layer w10: v1(660,595) 655,595 v1(780,470) ; v1(1380,690) 1380,625 1493.17,511.83 U3.51
  Bottom Layer w10: v1(660,595) 804,739 814.86,739 867.86,792 917.99,792 918.08,792.09 1271.09,792.09 1380,683.18 v1(1380,690) ; v1(780,470) 780,458.18 720,398.18 720,270 802,188 P1.29
PC11: P1.31 U3.52 | length 1958.9
  Top Layer w10: v1(621.79,593.21) 740,475 v1(740,460) ; U3.52 1643.49,531.51 v1(1645,530)
  Bottom Layer w10: v1(621.79,593.21) 621.79,596.79 733,708 741.18,708 789.18,756 798.23,756 851.32,809.09 1452.72,809.09 1453.82,808 1476.18,808 1477.28,809.09 1585.18,809.09 1654,740.28 1654,579 1645,570 v1(1645,530) ; P1.31 690,227.47 690,410 v1(740,460)
USB_N: U1.6 U3.44 | length 1326.2
  Top Layer w10: U1.6 484.31,783.09 621.91,783.09 714,691 714,659.73 799,574.73 799,569.73 834.73,534 855.37,534 937.87,451.5 1117.72,451.5 1126.22,460 1188.53,460 1205.53,477 1244.47,477 1268.47,453 1358,453 v1(1365,460) ; U3.44@1357.74,364.19 1357.74,325.4 1380,303.14 v1(1380,300)
  Bottom Layer w10: v1(1365,460) 1380,445 v1(1380,300)
USB_P: U1.4 U3.45 | length 1249.4
  Top Layer w10: U1.4 392.6,771.38 400.88,763.09 613.62,763.09 694,682.72 694,651.45 779,566.45 779,561.45 826.45,514 847.08,514 929.58,431.5 1126,431.5 1134.5,440 1198,440 1198,441.18 1213.82,457 1236.18,457 1260.18,433 1349.74,433 1377.74,405 U3.45
pads on no net: P2.4 SW1.5 SW2.5

## Polygon pours and split planes (outlines as drawn)
GND on Bottom Layer "GND_BOT" (solid, remove dead copper, pour order 2): 125,0 2425,0 ccw(c2438.35,122.21) 2560,140 2560,1050 ccw(c2437.18,1058.87) 2415,1180 125,1180 ccw(c119.96,1059.75) 0,1050 0,125 ccw(c125,125)
GND on Top Layer "GND_TOP" (solid, remove dead copper, pour order 4): 125.2,-0.75 2425.2,-0.75 ccw(c2438.55,121.46) 2560.2,139.25 2560.2,1049.25 ccw(c2437.38,1058.12) 2415.2,1179.25 125.2,1179.25 ccw(c120.16,1059) 0.2,1049.25 0.2,124.25 ccw(c125.2,124.24)

## Keep-outs
Top Layer:
  region: 2575,290 2350,290 cw(c2347.5,312.5) 2325,310 2325,365 ccw(c2300,370) 2305,395 2240,395 cw(c2237.5,412.5) 2220,410 2220,760 cw(c2235,760) 2235,775 2575,775
Bottom Layer:
  region: 2575,290 2350,290 cw(c2347.5,312.5) 2325,310 2325,365 ccw(c2300,370) 2305,395 2240,395 cw(c2237.5,412.5) 2220,410 2220,760 cw(c2235,760) 2235,775 2575,775

## Silkscreen, mask and mechanical layers (free items; w line width, h text height)
Top Overlay:
  lines w5: 2375,875 2510,875 ; 2455,850 2455,875 2455,865 ; 2495,850 2495,875
  lines w7: 680,20 680,260 ; 1080,20 1080,260 ; 1480,20 1480,260 ; 1880,20 1880,260
  text "I2C PU" at 2375,890 h50
  text "G35  E3" at 10,615 h60 r270
  text "GEX  /     zero" at 565,565 h120
  text "4/2018  rev.1" at 580,500 h60
  text "NRF24L01+" at 1940,390 h80 r45
  text "G / DBG /  / SW CK / IO" at 495,270 h50
  text "1" at 2290,160 h80
  text "2" at 2290,60 h80
Bottom Overlay:
  lines w5: 514.64,545.36 ccw(c600,630.71) 600,510 940,510 ; 950,580 950,385 980,385 1000,365 1020,385 1050,385 1050,485 ; 960,510 990,510 ; 1050,570 1050,580 ; 1080,510 1090,510 ; 1180,510 1300,510 1320,490 1340,510 1490,510 ccw(c1490,630.71) 1575.36,545.36 1580,550 ; 1680,402 1683,399 1684,399 1687,402 ; 1825,402 1828,399 1829,399 1832,402
  lines w7: 285,50 285,220 ; 335,670 335,840 ; 335,755 2325,755 ; 485,370 790,370 ; 640,310 640,430 ; 680,50 680,220 ; 730,670 730,840 ; 1080,50 1080,220 ; 1130,670 1130,840 ; 1480,50 1480,220 ; 1530,670 1530,840 ; 1880,50 1880,220 ; 1930,670 1930,840 ; 2275,50 2275,220 ; 2325,670 2325,840
  text "Hold BOOT during RESET for DFU" at 1884,1113 h50
  text "PB12" at 470,840 h60 r315
  text "PB15 - MOSI 2" at 570,840 h60 r315
  text "PB0" at 670,840 h60 r315
  text "PC11 - RX 4" at 780,840 h60 r315
  text "PC10 - TX 4" at 880,840 h60 r315
  text "PB2" at 970,840 h60 r315
  text "GND" at 1075,840 h60 r315
  text "PB3 - SCK 1" at 1180,840 h60 r315
  text "PB4 - MISO 1" at 1270,840 h60 r315
  text "PB5 - MOSI 1" at 1370,840 h60 r315
  text "3V3" at 1470,840 h60 r315
  text "PB9" at 1570,840 h60 r315
  text "PA10" at 1670,840 h60 r315
  text "PB1" at 1770,840 h60 r315
  text "GND" at 1870,840 h60 r315
  text "PA8 - MCO" at 1970,840 h60 r315
  text "PB6 - SCL 1" at 2070,840 h60 r315
  text "PB7 - SDA 1" at 2160,840 h60 r315
  text "3V3" at 2270,840 h60 r315
  text "GND" at 370,830 h60 r315
  text "39 /  / 40" at 420,680 h60
  text "37 /  / 38" at 520,680 h60
  text "35 /  / 36" at 620,680 h60
  text "33 /  / 34" at 720,680 h60
  text "31 /  / 32" at 820,680 h60
  text "29 /  / 30" at 920,680 h60
  text "27 /  / 28" at 1020,680 h60
  text "25 /  / 26" at 1120,680 h60
  text "23 /  / 24" at 1220,680 h60
  text "21 /  / 22" at 1320,680 h60
  text "19 /  / 20" at 1420,680 h60
  text "17 /  / 18" at 1520,680 h60
  text "15 /  / 16" at 1620,680 h60
  text "13 /  / 14" at 1720,680 h60
  text "11 /  / 12" at 1820,680 h60
  text "9 /  / 10" at 1920,680 h60
  text "7 /  / 8" at 2020,680 h60
  text "5 /  / 6" at 2120,680 h60
  text "3 /  / 4" at 2220,680 h60
  text "1 /  / 2" at 2320,680 h60
  text "GND /  / 3V3 /  / 5V" at 245,670 h60
  text "PB13 - SCK 2" at 400,650 h60 r45
  text "PB14 - MISO 2" at 500,650 h60 r45
  text "PA6" at 590,650 h60 r45
  text "GND" at 700,650 h60 r45
  text "PA7" at 800,650 h60 r45
  text "GND" at 900,650 h60 r45
  text "PA5" at 1000,650 h60 r45
  text "PA4" at 1100,650 h60 r45
  text "PA3 - RX 2" at 1200,650 h60 r45
  text "PA2 - TX 2" at 1300,650 h60 r45
  text "GND" at 1410,650 h60 r45
  text "PA1" at 1500,650 h60 r45
  text "PA0" at 1600,650 h60 r45
  text "GND" at 1700,650 h60 r45
  text "PB8" at 1790,650 h60 r45
  text "PB11 - RX 3" at 1900,650 h60 r45
  text "PB10 - TX 3" at 2000,650 h60 r45
  text "GND" at 2100,650 h60 r45
  text "5V" at 2200,650 h60 r45
  text "5V" at 2290,650 h60 r45
  text "ADC" at 1380,440 h60
  text "PA9   GND" at 795,375 h60
  text "DAC" at 1050,305 h60
  text "GEX is a project by Ondrej Hruska / FEE, CTU in Prague, Dpt. of Measurement" at 2328,303 h50
  text "PA13   PA14" at 800,300 h60
  text "jumper - 3V reg  / disable (ext. 3V)" at -25,270 h50 r270
  text "www.ondrovo.com" at 2328,268 h65
  text "1 /  / 2" at 2340,60 h60
Mechanical 1:
  lines w7: -0.06,1062.89 cw(c117.94,1062.89) 117.94,1180.89 2440.78,1180.89 2440.89,1181 cw(c2440.89,1063) 2558.89,1063 2558.89,117.9 cw(c2440.89,117.9) 2440.89,-0.1 118.06,-0.1 cw(c118.06,117.9) 0.06,117.9 0.06,1062.89
Mechanical 13:
  lines w7: 285,1171 285,1180.39 ; 579,1170 579,1180.32 ; 779,1172 779,1180 ; 1073,1173 1073,1181 ; 1850.34,1166 1850.34,1180 ; 2291.28,1166 2291.28,1180 ; 2544,295.3 2559,295.3 ; 2544,767.74 2559,767.74

## Text inside footprints (layer, text, board x,y; h text height)
U3: Top Overlay "LQFP64" at 1417.11,649.62 h102.36 r180